# Altium PCB LVDS_BackLight.PcbDoc
Units mil, origin at the board's own origin, x right, y up, seen from the top; angles counter-clockwise.
Board outline 6000 x 4000 mil, 2 copper layers (Top Layer, Bottom Layer); 33 components, 43 nets, 240 pads, 0 vias.
Unrouted connection lines stored in the file: 118.
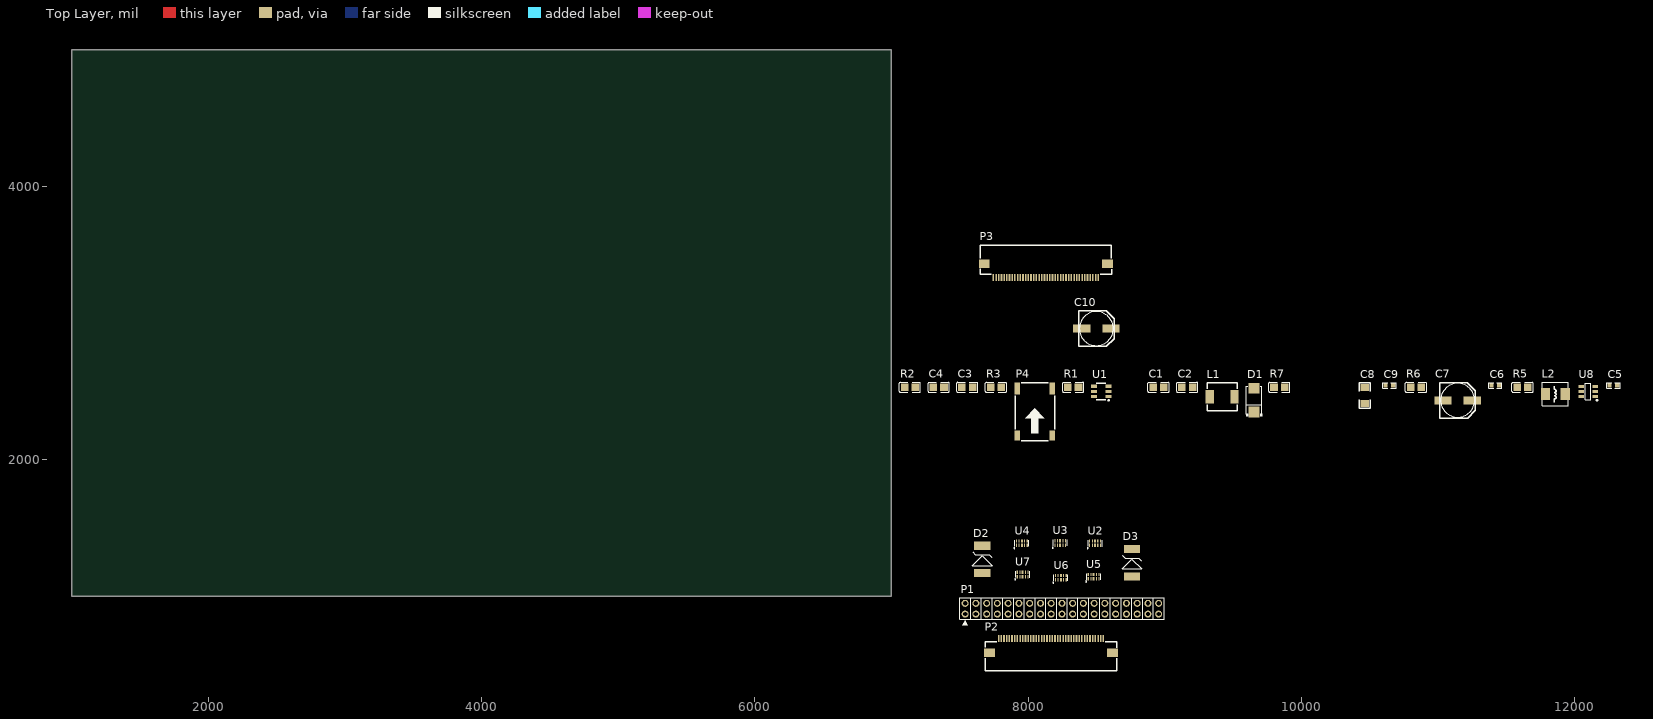
[diagram p0: Top Layer view]
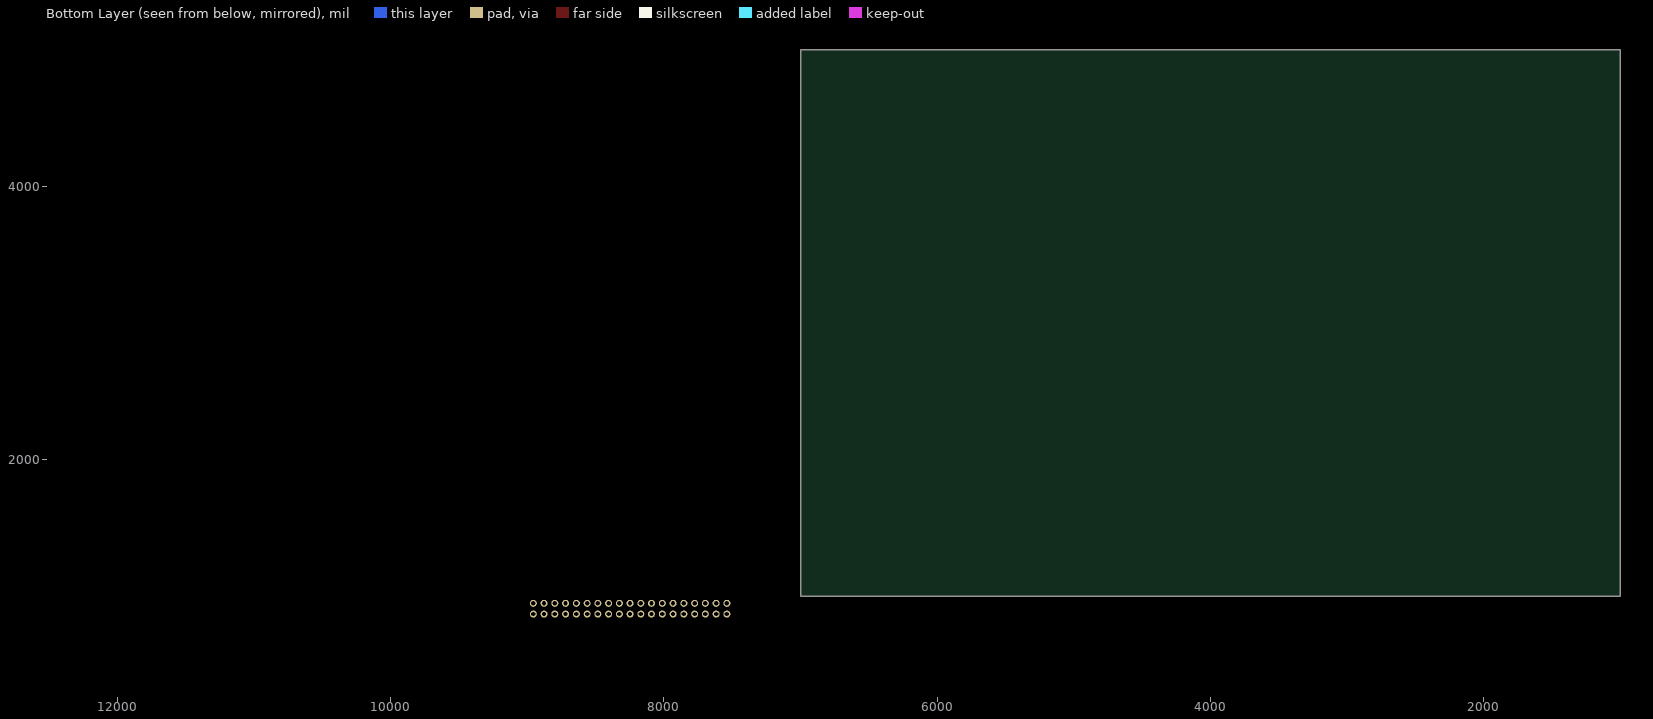
[diagram p1: Bottom Layer view, seen from below]

## Layer stack, top to bottom
Top Solder: solder mask 0.4, Solder Resist, Dk 3.5
Top Layer: signal copper 1.4
Dielectric 1: dielectric 12.6, FR-4, Dk 4.8
Bottom Layer: signal copper 1.4
Bottom Solder: solder mask 0.4, Solder Resist, Dk 3.5

## Board outline
1000,1000 7000,1000 7000,5000 1000,5000

## Design rules (kind name [scope] priority, off if disabled: settings)
Clearance [All] p1: gap=10 ignorepadtopadclearanceinfootprint=FALSE except(5: Arc-Arc Arc-Track Arc-SMDPad Track-Track Track-SMDPad SMDPad-SMDPad)
PolygonConnect [All] p1: connectstyle=Relief reliefconductorwidth=10 reliefentries=4 polygonreliefangle="90 Angle" airgapwidth=10
RoutingVias [All] p1: holewidth=28 width=50 viastyle="Through Hole" minholewidth=28 minwidth=50 maxholewidth=28 maxwidth=50
SolderMaskExpansion [All] p1: expansion=4 istentingtop=FALSE
SupplyNets "Schematic Supply Nets_4" [InNet('+5V')] p1: voltage=0.000
SupplyNets "Schematic Supply Nets_3" [InNet('GND')] p2: voltage=0.000
SupplyNets "Schematic Supply Nets" [InNet('+3.3V')] p3: voltage=0.000
Width [All] p1: maxlimit=10 minlimit=10 preferedwidth=10
30 further rules are at their usual default settings.

## Classes and differential pairs
component class LVDS_Port: P1 P2 P3
component class LVDS_BackLight: C1 C2 C3 C4 C5 C6 C7 C8 C9 C10 D1 D2 D3 L1 L2 P4 R1 R2 R3 R5 R6 R7 U1 U2 U3 U4 U6 U7 U8

## Components (designator, comment, footprint, x,y, rotation, side; value= is the part's Value field where it differs from the comment)
C1 "4.7uF" C0805 8955,2530 r0 top
C2 "4.7uF" C0805 9165,2530 r0 top
C3 "220nF" C0805 7555,2530 r0 top
C4 "NC" C0805 7345,2530 r0 top
C5 "104" "C 0603" 12285,2545 r0 top
C6 "104" "C 0603" 11420,2545 r0 top
C7 "120uF 20V SVPF" "CM D(6.3*7.7)" 11145,2435 r0 top
C8 "47uF/25V" "C 1206" 10465,2470 r90 top
C9 "104" "C 0603" 10645,2545 r0 top
C10 "120uF 20V SVPF" "CM D(6.3*7.7)" 8500,2960 r0 top
D1 "SS34" SS34_1 9655,2350 r90 top
D2 "SMBJ5.0A" SMBJ 7665,1265 r90 top
D3 "SMBJ3.3A" SMBJ 8760,1240 r90 top
L1 "L_22uH" L_22uH 9330,2460 r0 top
L2 "4.7uH" L-SMD-0420 11860,2480 r0 top
P1 "2.0mm_2x19" 2.0mm_2x19 7539,870 r0 top
P2 "FPC-40P" FPC-40P 8167.95,638.82 r180 top
P3 "FPC-40P" FPC-40P 8130,3385 r0 top
P4 "BH35-2P" BH35-2P 8050,2340 r0 top
R1 "10K" C0805 8330,2530 r0 top
R2 "4.7K" C0805 7135,2530 r0 top
R3 "0.85Ω 1%" C0805 7765,2530 r0 top
R5 "100K" C0805 11620,2530 r0 top
R6 "31.6K 1%" C0805 10840,2530 r0 top
R7 "10K 1%" C0805 9840,2530 r0 top
U1 "TPS61165BVR" TPS61165BVT 8535,2500 r0 top
U2 "AZ1143-04F" AZ1143-04F 8490.63,1388.8 r0 top
U3 "AZ1143-04F" AZ1143-04F 8235,1391.2 r0 top
U4 "AZ1143-04F" AZ1143-04F 7954.37,1388.8 r0 top
U5 "AZ1143-04F" AZ1143-04F 8480,1143.8 r0 top
U6 "AZ1143-04F" AZ1143-04F 8240,1136.2 r0 top
U7 "AZ1143-04F" AZ1143-04F 7960,1160 r0 top
U8 "SCT2230" SOT23-6N 12100,2500 r0 top

## Footprints (in the part's own frame and the unit in brackets; to place one, negate y for a bottom-side part, rotate by r counter-clockwise, add the part's x,y. Pads: shape width x height; smd on the part's side, far side on the other; paste and mask are expansions set on the pad)
2.0mm_2x19 [mm]
  round 1.3 hole 0.8: 1(0,0) 2(0,2) 3(2.007,0) 4(2.007,2) 5(4.013,0) 6(4.013,2) 7(5.994,0) 8(5.994,2) 9(8.001,0) 10(8.001,2) 11(10.008,0) 12(10.008,2) 13(12.014,0) 14(12.014,2) 15(14.021,0) 16(14.021,2) 17(16.002,0) 18(16.002,2) 19(18.009,0) 20(18.009,2) 21(19.99,0) 22(19.99,2) 23(21.996,0) 24(21.996,2) 25(24.003,0) 26(24.003,2) 27(25.984,0) 28(25.984,2) 29(27.991,0) 30(27.991,2) 31(29.997,0) 32(29.997,2) 33(32.004,0) 34(32.004,2) 35(34.011,0) 36(34.011,2) 37(35.992,0) 38(35.992,2)
  silkscreen extent -1,-2.04 36.99,3, body extent -1,-1 37,3, height 0.5
AZ1143-04F [mm] "ESD 保护阵列"
  rect 0.2x0.633 smd: 1(-1,-0.411) 2(-0.5,-0.411) 4(0.5,-0.411) 5(1,-0.411) 6(1,0.411) 7(0.5,0.411) 9(-0.5,0.411) 10(-1,0.411)
  rect 0.4x0.633 smd: 3(0,-0.411) 8(0,0.411)
  silkscreen extent -1.5,-1 1.3,0.55
BH35-2P [mm]
  rect 1x2.2 smd paste+0 mask+0.05: 1(-3.25,4.629) 2(3.25,4.629)
  rect 1x1.9 smd paste+0 mask+0.05: 3(3.25,-4.121) 4(-3.25,-4.121)
  silkscreen extent -3.68,-5.08 3.68,5.71
C0805 [mm]
  rect 1.41x1.35 smd paste-100 mask+0.051: 1(-1,0) 2(1,0)
  silkscreen extent -1.96,-0.9 1.96,0.9
"C 0603" [mil]
  rect 30x30 smd mask+2: 1(-28.25,0) 2(28.25,0)
  silkscreen extent -49,-20 49,20, body extent -31,-16 32,16, height 32
"C 1206" [mil]
  rect 51.18x60 smd: 1(-57.5,0) 2(57.5,0)
  silkscreen extent -93,-39 93,39, body extent -63,-32 63,32, height 48
"CM D(6.3*7.7)" [mm]
  rect 3.2x1.5 smd: 1(2.7,0) 2(-2.7,0)
  silkscreen extent -3.3,-3.3 3.3,3.3, body extent -3.5,-3.3 3.5,3.3, height 7.7
FPC-40P [mm]
  rect 0.3x1.3 smd paste+0 mask+0.05: 1(9.75,-1.3) 2(9.25,-1.3) 3(8.75,-1.3) 4(8.25,-1.3) 5(7.75,-1.3) 6(7.25,-1.3) 7(6.75,-1.3) 8(6.25,-1.3) 9(5.75,-1.3) 10(5.25,-1.3) 11(4.75,-1.3) 12(4.25,-1.3) 13(3.75,-1.3) 14(3.25,-1.3) 15(2.75,-1.3) 16(2.25,-1.3) 17(1.75,-1.3) 18(1.25,-1.3) 19(0.75,-1.3) 20(0.25,-1.3) 21(-0.25,-1.3) 22(-0.75,-1.3) 23(-1.25,-1.3) 24(-1.75,-1.3) 25(-2.25,-1.3) 26(-2.75,-1.3) 27(-3.25,-1.3) 28(-3.75,-1.3) 29(-4.25,-1.3) 30(-4.75,-1.3) 31(-5.25,-1.3) 32(-5.75,-1.3) 33(-6.25,-1.3) 34(-6.75,-1.3) 35(-7.25,-1.3) 36(-7.75,-1.3) 37(-8.25,-1.3) 38(-8.75,-1.3) 39(-9.25,-1.3) 40(-9.75,-1.3)
  rect 2x1.6 smd: 41(-11.45,1.3) 42(11.45,1.3)
  silkscreen extent -12.2,-0.7 12.25,4.7
L-SMD-0420 [mm]
  rect 1.7x2.2 smd: 1(-1.85,0) 2(1.85,0)
  silkscreen extent -2.39,-2.16 2.36,2.17, body extent -2.26,-2.06 2.24,2.04, height 1.91
L_22uH [mm]
  rect 1.5x2.5 smd: 1(0,0) 2(4.6,0)
  silkscreen extent -0.5,-2.6 5.1,2.6
SMBJ [mm]
  rect 1.5x3 smd: 1(-2.413,0) 2(2.667,0)
  silkscreen extent -1.02,-1.85 1.52,1.83
SOT23-6N [mm]
  rect 1x0.55 smd: 1(1.3,-0.95) 2(1.3,0) 3(1.3,0.95) 4(-1.3,0.95) 5(-1.3,0) 6(-1.3,-0.95)
  silkscreen extent -0.51,-1.78 1.78,1.55
SS34_1 [mm]
  rect 2x2 smd: 1(0,0) 2(4.4,0)
  silkscreen extent -0.78,-1.5 4.8,1.5
TPS61165BVT [mm]
  rect 1.1x0.6 smd paste+0 mask+0.051: 1(1.35,-0.95) 2(1.35,0) 3(1.35,0.95) 4(-1.35,0.95) 5(-1.35,0) 6(-1.35,-0.95)
  silkscreen extent -0.9,-1.78 1.52,1.55

## Part data
C1 C2 C3 C4: library part C
C5 C6 C9: library part C, "无极性贴片电容", BOM名称=无极性贴片电容, 学习资源=www.ooocke.com, 版权归属=源创客
C7 C10: library part C-CM, "贴片电解电容", BOM名称=贴片电解电容, 学习资源=www.ooocke.com, 版权归属=源创客
C8: library part C_1, "无极性贴片电容", BOM名称=无极性贴片电容, 学习资源=www.ooocke.com, 版权归属=源创客
D1: "肖特基二极管"
D2: library part SMBJ, "TVS"
D3: library part SMBJ_1, "TVS"
L2: library part L-CDRH, "功率屏蔽电感", BOM名称=功率屏蔽电感, 学习资源=www.ooocke.com, 版权归属=源创客
P2 P3: "下接上翻盖"
P4: "背光插头"
R1 R2 R3 R5 R6 R7: library part R
U1: "TI背光芯片"
U2 U3 U4 U5 U6 U7: "ESD 保护阵列"
U8: library part "DC JW5060T_6", "DC降压芯片"

## Nets (pads, with @x,y where several pads share a name; then routed paths per layer and width w, separated by ;. In a path a pad name is that pad's centre, name@x,y a point inside that pad or via, vN(x,y) a via of type N, cw(c..) or ccw(c..) an arc to the next point about the centre after c; other vN are vias at no path point)
+3.3V: C6.2 C7.1 D3.2 L2.2 R6.1
+5V: C1.2 C8.2 C9.2 C10.1 D2.2 L1.1 P1.1 P1.2 P1.3 P2.38 P2.39 R5.2 U1.1 U8.3
GND: C1.1 C2.1 C3.1 C4.1 C6.1 C7.2 C8.1 C9.1 C10.2 D2.1 D3.1 P1.4 P1.5 P1.6 P1.13 P1.14 P1.24 P1.25 P1.31 P1.32 P2.11 P2.16 P2.19 P2.22 P2.25 P2.28 P2.31 P2.34 R2.1 R3.1 R7.2 U1.4 U2.3 U2.8 U3.3 U3.8 U4.3 U4.8 U5.3 U5.8 U6.3 U6.8 U7.3 U7.8 U8.1
LCD_PWM: P1.33 R1.2 R2.2
LED+: C2.2 D1.1 P4.1
LED-: P4.2 R3.2 U1.6
LVDS0_D0_N: P1.7 U2.2
LVDS0_D0_P: P1.8 U2.1
LVDS0_D1_N: P1.9 U2.5
LVDS0_D1_P: P1.10 U2.4
LVDS0_D2_N: P1.11 U3.2
LVDS0_D2_P: P1.12 U3.1
LVDS0_D3_N: P1.17 U3.5
LVDS0_D3_P: P1.18 U3.4
LVDS0_DCK_N: P1.15 U4.2
LVDS0_DCK_P: P1.16 U4.1
LVDS1_D0_N: P2.33 U5.2
LVDS1_D0_P: P2.32 U5.1
LVDS1_D1_N: P2.30 U5.5
LVDS1_D1_P: P2.29 U5.4
LVDS1_D2_N: P2.27 U6.2
LVDS1_D2_P: P2.26 U6.1
LVDS1_D3_N: P2.21 U6.5
LVDS1_D3_P: P2.20 U6.4
LVDS1_DCK_N: P2.24 U7.2
LVDS1_DCK_P: P2.23 U7.1
LVDS_CLK_N: P3.21 U4.9 U7.9
LVDS_CLK_P: P3.20 U4.10 U7.10
LVDS_OUT0_N: P3.13 U2.9 U5.9
LVDS_OUT0_P: P3.12 U2.10 U5.10
LVDS_OUT1_N: P3.15 U2.6 U5.6
LVDS_OUT1_P: P3.14 U2.7 U5.7
LVDS_OUT2_N: P3.19 U3.9 U6.9
LVDS_OUT2_P: P3.18 U3.10 U6.10
LVDS_OUT3_N: P3.23 U3.6 U6.6
LVDS_OUT3_P: P3.22 U3.7 U6.7
NetC3_2: C3.2 U1.5
NetC4_2: C4.2 R1.1 U1.2
NetC5_1: C5.1 U8.6
NetC5_2: C5.2 L2.1 U8.2
NetD1_2: D1.2 L1.2 U1.3
NetR5_1: R5.1 U8.5
NetR6_2: R6.2 R7.1 U8.4
pads on no net: P1.19 P1.20 P1.21 P1.22 P1.23 P1.26 P1.27 P1.28 P1.29 P1.30 P1.34 P1.35 P1.36 P1.37 P1.38 P2.1 P2.2 P2.3 P2.4 P2.5 P2.6 P2.7 P2.8 P2.9 P2.10 P2.12 P2.13 P2.14 P2.15 P2.17 P2.18 P2.35 P2.36 P2.37 P2.40 P2.41 P2.42 P3.1 P3.2 P3.3 P3.4 P3.5 P3.6 P3.7 P3.8 P3.9 P3.10 P3.11 P3.16 P3.17 P3.24 P3.25 P3.26 P3.27 P3.28 P3.29 P3.30 P3.31 P3.32 P3.33 P3.34 P3.35 P3.36 P3.37 P3.38 P3.39 P3.40 P3.41 P3.42 P4.3 P4.4 U4.4 U4.5 U4.6 U4.7 U7.4 U7.5 U7.6 U7.7